# Altium PCB PCB1.PcbDoc
Units mm, origin at the board's own origin, x right, y up, seen from the top; angles counter-clockwise.
Board outline 152.4 x 101.6 mm, 2 copper layers (Top Layer, Bottom Layer); 52 components, 62 nets, 179 pads, 4 vias.
Unrouted connection lines stored in the file: 100.
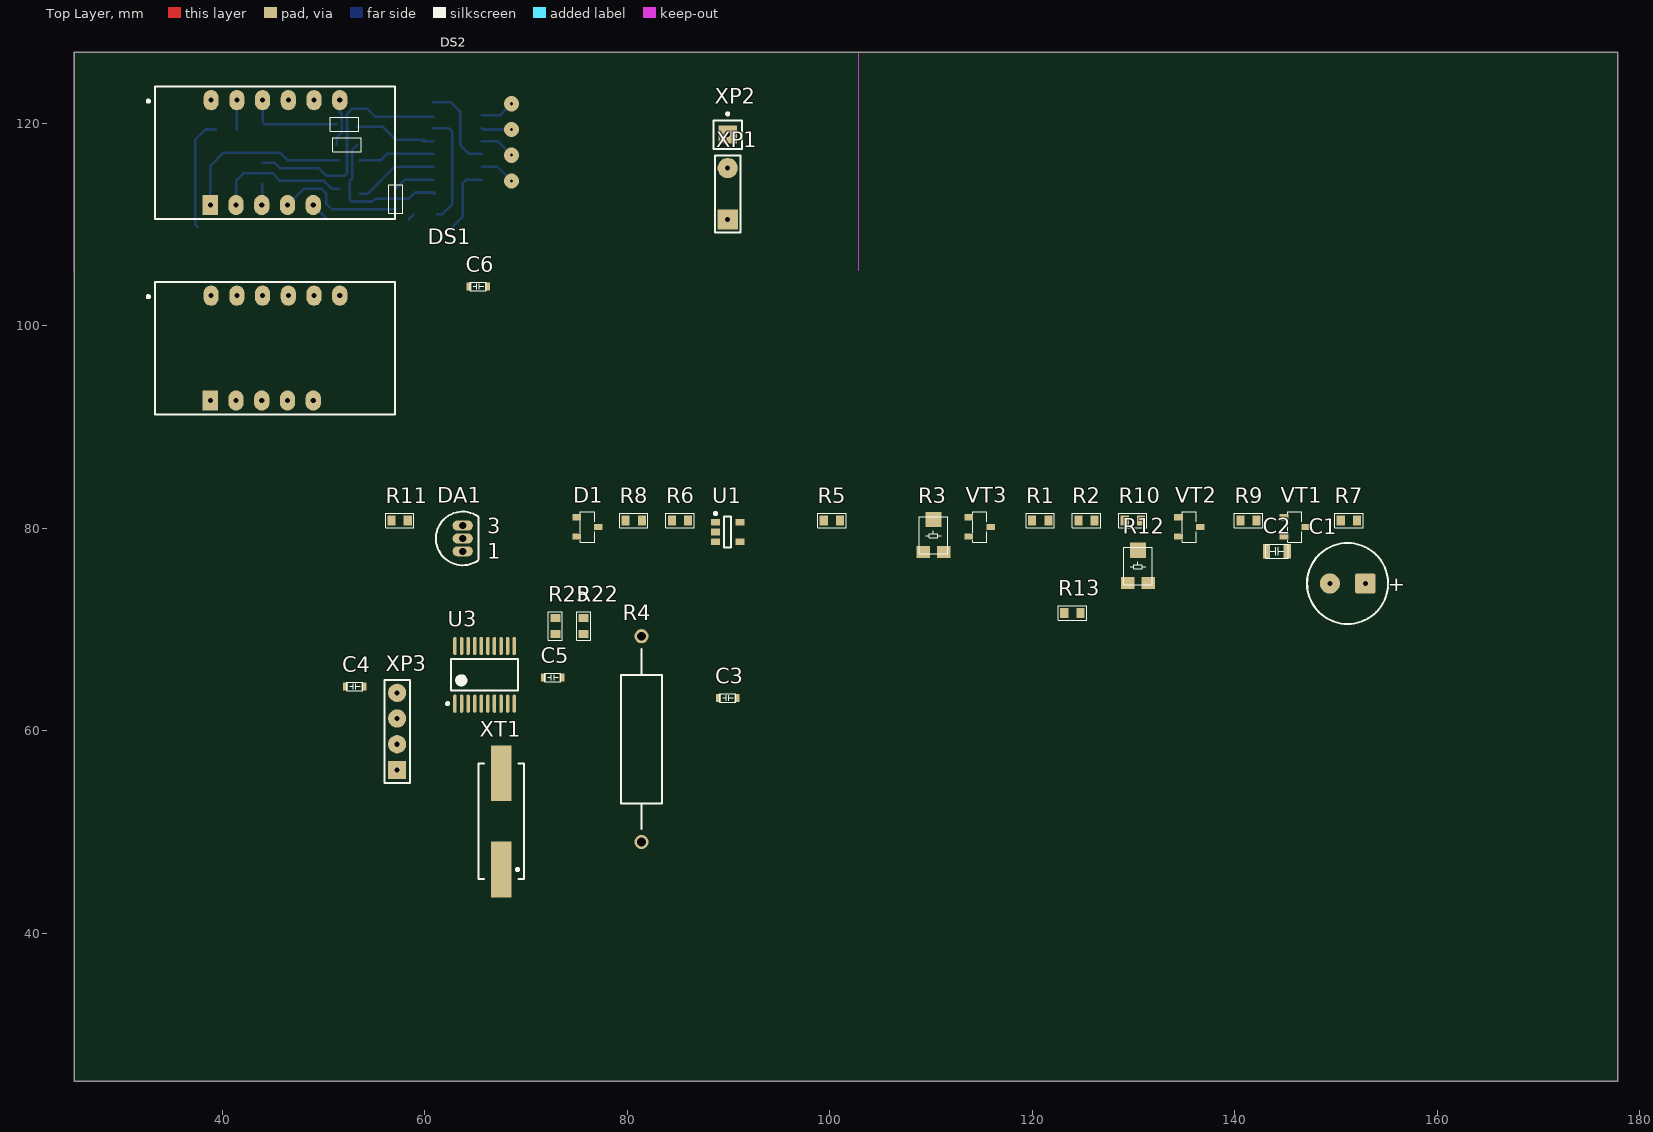
[diagram p0: Top Layer view]
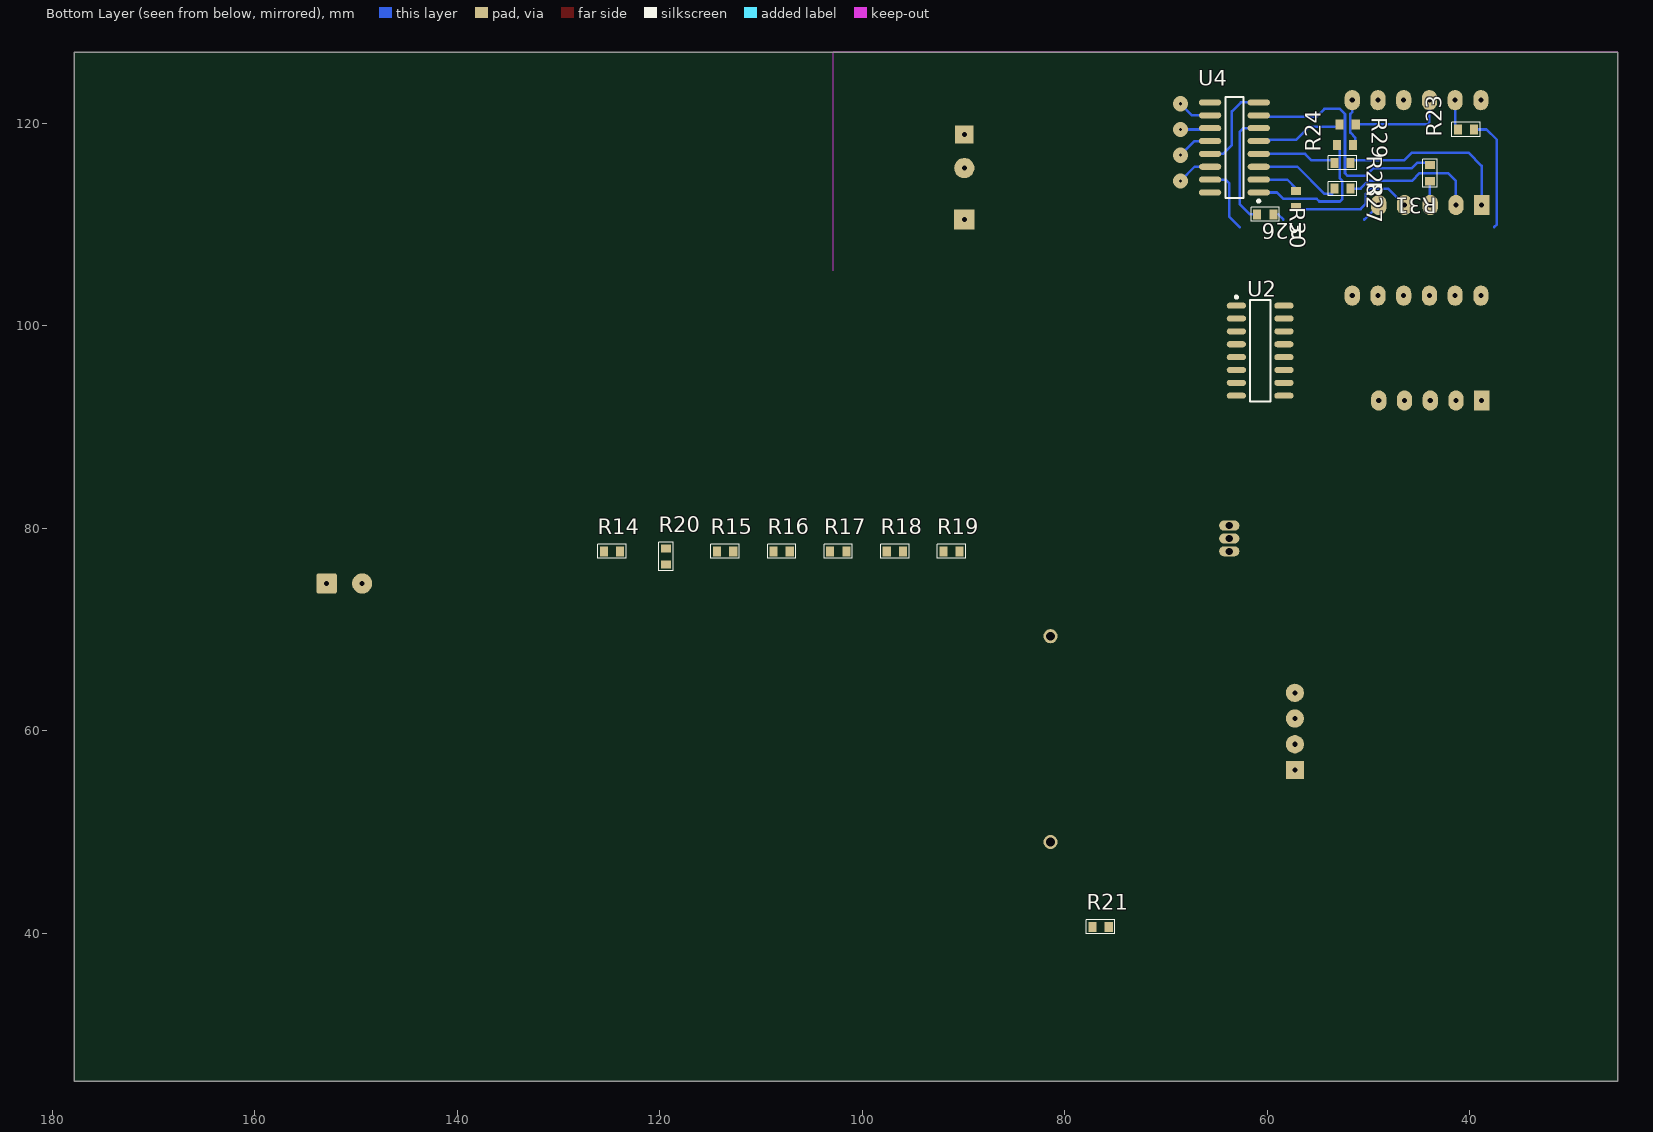
[diagram p1: Bottom Layer view, seen from below]

## Layer stack, top to bottom
Top Solder: solder mask 0.0102, Solder Resist, Dk 3.5
Top Layer: signal copper 0.0356
Dielectric 1: dielectric 0.32, FR-4, Dk 4.8
Bottom Layer: signal copper 0.0356
Bottom Solder: solder mask 0.0102, Solder Resist, Dk 3.5

## Board outline
25.4,25.4 177.8,25.4 177.8,127 25.4,127

## Design rules (kind name [scope] priority, off if disabled: settings)
Clearance [All] p1: gap=0.254
PolygonConnect [All] p1: connectstyle=Relief reliefconductorwidth=0.254 reliefentries=4 polygonreliefangle="90 Angle" airgapwidth=0.254
RoutingVias [All] p1: holewidth=0.711 width=1.27 viastyle="Through Hole" minholewidth=0.711 minwidth=1.27 maxholewidth=0.711 maxwidth=1.27
SolderMaskExpansion [All] p1: expansion=0.102
Width [All] p1: maxlimit=0.254 minlimit=0.254 preferedwidth=0.254
29 further rules are at their usual default settings.

## Components (designator, comment, footprint, x,y, rotation, side; value= is the part's Value field where it differs from the comment)
C1 "100uF" CAP_DIP_3.5_VERT 151.13,74.549 r0 top
C2 "0.1" "CAP 0805_M" 144.145,77.724 r0 top
C3 "20" "CAP 0603" 89.916,63.246 r0 top
C4 "20" "CAP 0603" 53.086,64.389 r0 top
C5 "0.1" "CAP 0603" 72.644,65.278 r0 top
C6 "0.1" "CAP 0603" 65.278,103.886 r0 top
D1 "Diode Zener" SOT23_L 76.073,80.137 r0 top
DA1 "L78L33_ABZ" TO92 63.754,78.994 r0 top
DS1 "KEM-3631-AG" KEM-3631-AG 45.212,97.79 r0 top
DS2 "KEM-3631-AG" KEM-3631-AG 45.212,117.094 r0 top
R1 "20k" "RES 0603_N"#1 120.777,80.772 r0 top
R2 "270k" "RES 0603_N"#1 125.349,80.772 r0 top
R3 "20k" "RES VAR 1" 110.236,79.248 r0 top
R4 "0.15" AXIAL-0.8 81.407,59.182 r90 top
R5 "10k" "RES 0603_N"#1 100.203,80.772 r0 top
R6 "1k" "RES 0603_N"#1 85.217,80.772 r0 top
R7 "560" "RES 0603_N"#1 151.257,80.772 r0 top
R8 "100k" "RES 0603_N"#1 80.645,80.772 r0 top
R9 "560" "RES 0603_N"#1 141.351,80.772 r0 top
R10 "560" "RES 0603_N"#1 129.921,80.772 r0 top
R11 "51k" "RES 0603_N"#1 57.531,80.772 r0 top
R12 "10k" "RES VAR 1" 130.429,76.2 r0 top
R13 "5k1" "RES 0603_N"#1 123.952,71.628 r0 top
R14 "200" "RES 0603_N"#1 124.714,77.724 r180 bottom
R15 "200" "RES 0603_N"#1 113.538,77.724 r180 bottom
R16 "200" "RES 0603_N"#1 107.95,77.724 r180 bottom
R17 "200" "RES 0603_N"#1 102.362,77.724 r180 bottom
R18 "200" "RES 0603_N"#1 96.774,77.724 r180 bottom
R19 "200" "RES 0603_N"#1 91.186,77.724 r180 bottom
R20 "200" "RES 0603_N"#1 119.38,77.216 r90 bottom
R21 "200" "RES 0603_N"#1 76.454,40.64 r180 bottom
R22 "100k" "RES 0603_N"#1 75.692,70.358 r90 top
R23 "200" "RES 0603_N"#1 40.386,119.38 r0 bottom
R24 "200" "RES 0603_N"#2 52.324,117.856 r0 bottom
R25 "100k" "RES 0603_N"#1 72.898,70.358 r90 top
R26 "200" "RES 0603_N"#2 57.15,112.522 r270 bottom
R27 "200" "RES 0603_N"#1 52.578,113.538 r180 bottom
R28 "200" "RES 0603_N"#1 52.578,116.078 r180 bottom
R29 "200" "RES 0603_N"#2 52.07,119.888 r180 bottom
R30 "200" "RES 0603_N"#1 60.198,110.998 r180 bottom
R31 "200" "RES 0603_N"#1 43.942,115.062 r270 bottom
U1 "MCP601" SOT23-5_L 89.916,79.629 r0 top
U2 "74HC595D SMD" SOIC16_L 60.706,97.536 r180 bottom
U3 "STM32F050F4P6-IL20" TSSOP20_N 65.913,65.532 r90 top
U4 "74HC595D SMD" SOIC16_N 63.246,117.602 r0 bottom
VT1 "BC817" SOT23_L 145.923,80.137 r0 top
VT2 "BC817" SOT23_L 135.509,80.137 r0 top
VT3 "BC817" SOT23_L 114.808,80.137 r0 top
XP1 "+/- 50V" con_1X2_5.08 89.916,110.49 r90 top
XP2 "7-30V" Con_PIN1 89.916,118.872 r0 top
XP3 "SWD" Con_1X4 57.277,56.134 r90 top
XT1 "8MHZ" XTALL_SMD_M 67.564,51.054 r90 top

## Footprints (in the part's own frame and the unit in brackets; to place one, negate y for a bottom-side part, rotate by r counter-clockwise, add the part's x,y. Pads: shape width x height; smd on the part's side, far side on the other; paste and mask are expansions set on the pad)
AXIAL-0.8 [mm] "Axial Device, Thru-Hole; 2 Leads; 0.8 in Pin Spacing"
  round 1.4 hole 0.85: 1(-10.16,0) 2(10.16,0)
  silkscreen extent -8.89,-2.03 8.89,2.03
"CAP 0603" [mm] "Chip Resistor, Body 2.0x1.2mm, IPC Low Density"
  rect 0.5x0.8 smd: 1(-0.925,0) 2(0.925,0)
  silkscreen extent -0.8,-0.43 0.8,0.43, body extent -0.8,-0.4 0.8,0.4, height 0.6
"CAP 0805_M" [mm] "Chip Resistor, Body 2.0x1.2mm, IPC Low Density"
  rect 0.7x1.4 smd: 1(-1.025,0) 2(1.025,0)
  silkscreen extent -1.1,-0.7 1.1,0.7, body extent -1,-0.6 1,0.6, height 1.2
CAP_DIP_3.5_VERT [mm] "Polarized Capacitor (Radial); 2 Leads"
  rrect20% 2x2 hole 0.5: 1(1.75,0)
  round 2 hole 0.5: 2(-1.75,0)
  silkscreen extent -4,-4 4,4, body extent -4,-4 4,4, height 13
con_1X2_5.08 [mm] "Connector; Header; 2 Position"
  rect 2x2 hole 0.5: 1(0,0)
  round 2 hole 0.5: 2(5.08,0)
  silkscreen extent -1.27,-1.27 6.3,1.27, body extent -1.31,-1.29 6.31,1.25, height 8.85
Con_1X4 [mm] "Connector; Header; 4 Position"
  rect 1.8x1.8 hole 0.5: 1(0,0)
  round 1.8 hole 0.5: 2(2.54,0) 3(5.08,0) 4(7.62,0)
  silkscreen extent -1.27,-1.27 8.89,1.27, body extent -1.27,-1.27 8.89,1.27, height 8.85
Con_PIN1 [mm] "Connector; Plug"
  rect 1.8x1.8 hole 0.5: 1(0,0)
  silkscreen extent -1.4,-1.4 1.4,2.17, body extent -1.27,-1.27 1.27,1.27, height 8.85
KEM-3631-AG [mm] "LED, 7-Segment Display, 7.62 mm, RHD; 10 Leads; Row Space 5.08 mm; Pitch 2.54 mm"
  rect 1.5x2 hole 0.5: 1(-6.38,-5.18)
  oval 1.5x2 hole 0.5: 2(-3.84,-5.18) 3(-1.3,-5.18) 4(1.24,-5.18) 5(3.78,-5.18) 7(6.4,5.18) 8(3.86,5.18) 9(1.32,5.18) 10(-1.22,5.18) 11(-3.76,5.18) 12(-6.3,5.18)
  silkscreen extent -12.62,-6.55 11.85,6.55, body extent -18.87,-9.5 18.93,9.5, height 12
"RES 0603_N"#1 [mm] "Chip Resistor, Body 2.0x1.2mm, IPC Low Density"
  rect 0.8x1 smd: 1(-0.8,0) 2(0.8,0)
  silkscreen extent -1.4,-0.7 1.4,0.7, body extent -0.85,-0.4 0.85,0.4, height 0.56
"RES 0603_N"#2 [mm] "Chip Resistor, Body 2.0x1.2mm, IPC Low Density"
  rect 0.8x1 smd: 1(0.8,0) 2(-0.8,0)
  body extent -0.85,-0.4 0.85,0.4, height 0.56
"RES VAR 1" [mm] "Chip Resistor, Body 2.0x1.2mm, IPC Low Density"
  rect 1.3x1.2 smd: 1(-1.016,-1.6) 3(1.016,-1.6)
  rect 1.6x1.5 smd: 2(0,1.626)
  silkscreen extent -1.4,-1.78 1.4,1.91
SOIC16_L [mm] "SOIC, 16-Leads, Body 9.9x3.9mm, Pitch 1.27mm, IPC High Density"
  oval 1.9x0.6 smd: 1(-2.35,4.445) 2(-2.35,3.175) 3(-2.35,1.905) 4(-2.35,0.635) 5(-2.35,-0.635) 6(-2.35,-1.905) 7(-2.35,-3.175) 8(-2.35,-4.445) 9(2.35,-4.445) 10(2.35,-3.175) 11(2.35,-1.905) 12(2.35,-0.635) 13(2.35,0.635) 14(2.35,1.905) 15(2.35,3.175) 16(2.35,4.445)
  silkscreen extent -2.48,-5 1,5.42, body extent -3,-4.95 3,4.95, height 1.4
SOIC16_N [mm] "SOIC, 16-Leads, Body 9.9x3.9mm, Pitch 1.27mm, IPC Medium Density"
  oval 2.2x0.6 smd: 1(-2.4,4.445) 2(-2.4,3.175) 3(-2.4,1.905) 4(-2.4,0.635) 5(-2.4,-0.635) 6(-2.4,-1.905) 7(-2.4,-3.175) 8(-2.4,-4.445) 9(2.4,-4.445) 10(2.4,-3.175) 11(2.4,-1.905) 12(2.4,-0.635) 13(2.4,0.635) 14(2.4,1.905) 15(2.4,3.175) 16(2.4,4.445)
  silkscreen extent -2.52,-5 0.9,5.42, body extent -3,-4.95 3,4.95, height 1.4
SOT23-5_L [mm] "SOT23, 5-Leads, Body 2.9x1.7mm, Pitch 0.95mm, Lead Span 2.8mm, IPC High Density"
  rect 0.9x0.65 smd: 1(-1.2,0.95) 2(-1.2,0) 3(-1.2,-0.95) 4(1.2,-0.95) 5(1.2,0.95)
  silkscreen extent -1.32,-1.55 0.35,1.95, body extent -1.5,-1.5 1.5,1.5, height 1.3
SOT23_L [mm] "SOT23, 3-Leads, Body 2.9x1.3mm, Pitch 0.95mm, Lead Span 2.3mm - Reverse Pinning, IPC High Density"
  rect 0.85x0.6 smd: 1(-1.075,0.95) 2(-1.075,-0.95) 3(1.075,0)
  silkscreen extent -0.7,-1.5 0.7,1.5, body extent -1.25,-1.5 1.25,1.5, height 1.1
TO92 [mm] "TO, Flat Index; 3 In-Line, Axial Leads; Body Dia. 4.8mm; Leads 0.51 x 0.51 mm (max)"
  oval 2x1 hole 0.7: 1(0,-1.27) 2(0,0) 3(0,1.27)
  silkscreen extent -2.65,-2.65 1.55,2.65, body extent -2.42,-2.4 1.58,2.4, height 10.35
TSSOP20_N [mm] "SOP, 20-Leads, Body 6.6x4.5mm, Pitch 0.65mm, IPC Medium Density"
  oval 1.8x0.35 smd: 1(-2.85,2.925) 2(-2.85,2.275) 3(-2.85,1.625) 4(-2.85,0.975) 5(-2.85,0.325) 6(-2.85,-0.325) 7(-2.85,-0.975) 8(-2.85,-1.625) 9(-2.85,-2.275) 10(-2.85,-2.925) 11(2.85,-2.925) 12(2.85,-2.275) 13(2.85,-1.625) 14(2.85,-0.975) 15(2.85,-0.325) 16(2.85,0.325) 17(2.85,0.975) 18(2.85,1.625) 19(2.85,2.275) 20(2.85,2.925)
  silkscreen extent -2.97,-3.3 1.55,3.77, body extent -3.27,-3.3 3.28,3.3, height 1.2
XTALL_SMD_M [mm] "Quartz Crystal, SM; Body 13.4 (inc. leads) x 4.9 mm (LxW max)"
  rect 5.5x2 smd: 1(-4.75,0) 2(4.75,0)
  silkscreen extent -5.7,-2.25 5.7,2.25, body extent -6.25,-2.4 6.25,2.4, height 4

## Part data
C1: library part Capacitor_DIP
C2 C3 C4 C5 C6: library part Capacitor_SMD
D1: "Zener Diode"
DA1: "Positive Voltage Regulator"
DS1 DS2: "7.62 mm Black Surface Green 7-Segment Display: CC, RH DP"
R1 R2 R5 R6 R7 R8 R9 R10 R11 R13 R14 R15 R16 R17 R18 R19 R20 R21 R22 R23 R24 R25 R26 R27 R28 R29 R30 R31: library part Resistor_SMD
R3 R12: library part "Res Tap", "Tapped Resistor"
R4: library part Res2, "Resistor"
U1: "Operation amplifier, 2.7V to 2.6V, Single Supply"
U2 U4: "8-Bit Shift Register with 3-State Output Registers"
VT1 VT2 VT3: "NPN General-purpose Transistor"
XP1: library part Connectors_1x2_PIN, "Header, 2-Pin"
XP2: library part Connectors_1x1_PIN, "Plug papa"
XP3: library part Connectors_1x4_PIN, "Header, 4-Pin"
XT1: library part XTAL, "Crystal Oscillator"

## Via types
v1: diameter 1.5, hole 0.3, Top Layer to Bottom Layer, 4 vias

## Nets (pads, with @x,y where several pads share a name; then routed paths per layer and width w, separated by ;. In a path a pad name is that pad's centre, name@x,y a point inside that pad or via, vN(x,y) a via of type N, cw(c..) or ccw(c..) an arc to the next point about the centre after c; other vN are vias at no path point)
GND: C1.2 C2.1 C3.2 C4.2 C5.2 C6.2 D1.1 DA1.2 R4.2 R5.1 R8.1 R13.2 U1.2 U2.8 U2.13 U3.15 U4.8 U4.13 VT1.2 VT2.2 VT3.2 XP1.2 XP3.3 | length 8.8
  Bottom Layer w0.254: U4.8 62.611,122.047 63.5,121.158 63.5,117.856 64.389,116.967 U4.13
K1: R7.1 U3.12
K2: R9.1 U3.17
K3: R10.1 U3.18
LATCH: U2.12 U3.6 U4.12 | length 3.5
  Bottom Layer w0.254: U4.12 67.183,118.237 v1(68.58,116.84)
"MEASURE I": D1.3 R3.3 R8.2 U1.1 U3.9
"MEASURE U": R12.2 U3.10
MOSI: U2.14 U3.13 U4.14 | length 3.5
  Bottom Layer w0.254: U4.14 67.183,115.697 v1(68.58,114.3)
NetC1_1: C1.1 DA1.3 R11.2 XP2.1
NetC3_1: C3.1 U3.2 XT1.2
NetC4_1: C4.1 U3.3 XT1.1
NetC5_1: C5.1 R25.2 U3.4
NetDS1_1: DS1.1 R18.2
NetDS1_2: DS1.2 R17.2
NetDS1_3: DS1.3 R21.2
NetDS1_4: DS1.4 R16.2
NetDS1_5: DS1.5 R20.2
NetDS1_7: DS1.7 R15.2
NetDS1_8: DS1.8 DS2.8 VT3.3
NetDS1_9: DS1.9 DS2.9 VT2.3
NetDS1_10: DS1.10 R19.2
NetDS1_11: DS1.11 R14.2
NetDS1_12: DS1.12 DS2.12 VT1.3
NetDS2_1: DS2.1 R28.2 | length 17.5
  Bottom Layer w0.254: DS2.1 38.832,115.794 40.132,117.094 45.72,117.094 46.482,116.332 R28.2@51.553,116.332
NetDS2_2: DS2.2 R27.2 | length 13.5
  Bottom Layer w0.254: DS2.2 41.372,114.27 42.164,115.062 44.958,115.062 45.72,114.3 50.038,114.3 50.8,113.538 R27.2@51.553,113.538
NetDS2_3: DS2.3 R31.2 | length 2.1
  Bottom Layer w0.254: DS2.3@43.942,111.944 R31.2@43.942,114.037
NetDS2_4: DS2.4 R26.2 | length 12.8
  Bottom Layer w0.254: DS2.4 48.076,113.538 49.784,113.538 50.292,113.03 50.292,112.014 50.8,111.506 57.15,111.506
NetDS2_5: DS2.5 R30.2 | length 2.7
  Bottom Layer w0.254: DS2.5 50.416,110.49 ; 58.411,110.49 58.919,110.998
NetDS2_7: DS2.7 R24.2 | length 5.2
  Bottom Layer w0.254: R24.2@51.299,117.856 51.299,118.553 51.807,119.061 51.807,120.913 51.612,121.108 DS2.7 DS2.7@51.299,121.961
NetDS2_10: DS2.10 R29.2 | length 9.6
  Bottom Layer w0.254: DS2.10 43.992,120.092 44.196,119.888 51.299,119.888
NetDS2_11: DS2.11 R23.2 | length 2.9
  Bottom Layer w0.254: R23.2@41.411,119.38 41.452,119.421 DS2.11
NetR1_1: R1.1 R5.2 U1.4
NetR1_2: R1.2 R2.1
NetR2_2: R2.2 R3.1 R3.2
NetR4_1: R4.1 R6.1 XP1.1
NetR6_2: R6.2 U1.3
NetR7_2: R7.2 VT1.1
NetR9_2: R9.2 VT2.1
NetR10_2: R10.2 VT3.1
NetR11_1: R11.1 R12.3
NetR12_1: R12.1 R13.1
NetR14_1: R14.1 U2.15
NetR15_1: R15.1 U2.1
NetR16_1: R16.1 U2.2
NetR17_1: R17.1 U2.3
NetR18_1: R18.1 U2.4
NetR19_1: R19.1 U2.5
NetR20_1: R20.1 U2.6
NetR21_1: R21.1 U2.7
NetR22_2: R22.2 U3.1
NetR23_1: R23.1 U4.15 | length 18
  Bottom Layer w0.254: 37.592,109.728 37.338,109.982 37.338,118.364 38.354,119.38 R23.1@39.361,119.38 ; 62.738,109.728 63.754,110.744 63.754,114.046 64.135,114.427 U4.15
NetR24_1: R24.1 U4.1 | length 14.6
  Bottom Layer w0.254: R24.1@53.349,117.856 52.832,117.339 52.832,114.554 52.578,114.3 52.578,112.522 52.832,112.268 54.864,112.268 55.118,112.522 58.42,112.522 59.055,113.157 U4.1 U4.1@60.969,113.034
NetR26_1: R26.1 U4.2 | length 4.1
  Bottom Layer w0.254: 57.15,113.547 58.03,114.427 U4.2
NetR27_1: R27.1 U4.3 | length 8.3
  Bottom Layer w0.254: 53.603,113.03 54.356,113.03 57.023,115.697 U4.3
NetR28_1: R28.1 U4.4 | length 7.5
  Bottom Layer w0.254: R28.1@53.594,116.332 55.626,116.332 56.261,116.967 U4.4
NetR29_1: R29.1 U4.5 | length 8.3
  Bottom Layer w0.254: 53.34,119.634 55.871,119.634 57.15,118.355 59.935,118.355 59.817,118.237 U4.5
NetR30_1: R30.1 U4.6 | length 11.1
  Bottom Layer w0.254: U4.6 62.357,119.507 62.738,119.126 62.738,112.014 61.722,110.998 R30.1@61.223,110.998
NetR31_1: R31.1 U4.7 | length 23.9
  Bottom Layer w0.254: R31.1@43.942,116.087 45.203,116.087 45.72,115.57 49.53,115.57 50.292,114.808 52.07,114.808 52.324,115.062 52.324,120.904 52.832,121.412 54.356,121.412 55.118,120.65 U4.7@60.846,120.65
NetU3_19: U3.19 XP3.4
NetU3_20: U3.20 XP3.2
SCLK: U2.11 U3.11 U4.11 | length 3
  Bottom Layer w0.254: U4.11 65.773,119.38 v1(68.58,119.38)
VCC: C2.2 C6.1 DA1.1 R22.1 R25.1 U1.5 U2.10 U2.16 U3.5 U3.16 U4.10 U4.16 XP3.1 | length 3.4
  Bottom Layer w0.254: U4.10 67.437,120.777 v1(68.58,121.92)
pads on no net: D1.2 U2.9 U3.7 U3.8 U3.14 U4.9

## Keep-outs
Keep-Out Layer:
  lines w0.05: 25.4,105.41 25.4,127 102.87,127 102.87,105.41

## Text inside footprints (layer, text, board x,y; h text height)
C1: Top Overlay "+" at 155.105,73.799 h1.5
DA1: Top Overlay "3" at 66.175,79.461 h1.5; Top Overlay "1" at 66.175,77.015 h1.5